# Altium PCB customteensypcb.PcbDoc (part 2 of 2)
Units mil, origin at the board's own origin, x right, y up, seen from the top; angles counter-clockwise.
Board outline 6000 x 4000 mil, 2 copper layers (Top Layer, Bottom Layer); 32 components, 60 nets, 197 pads, 41 vias.
Unrouted connection lines stored in the file: 2.
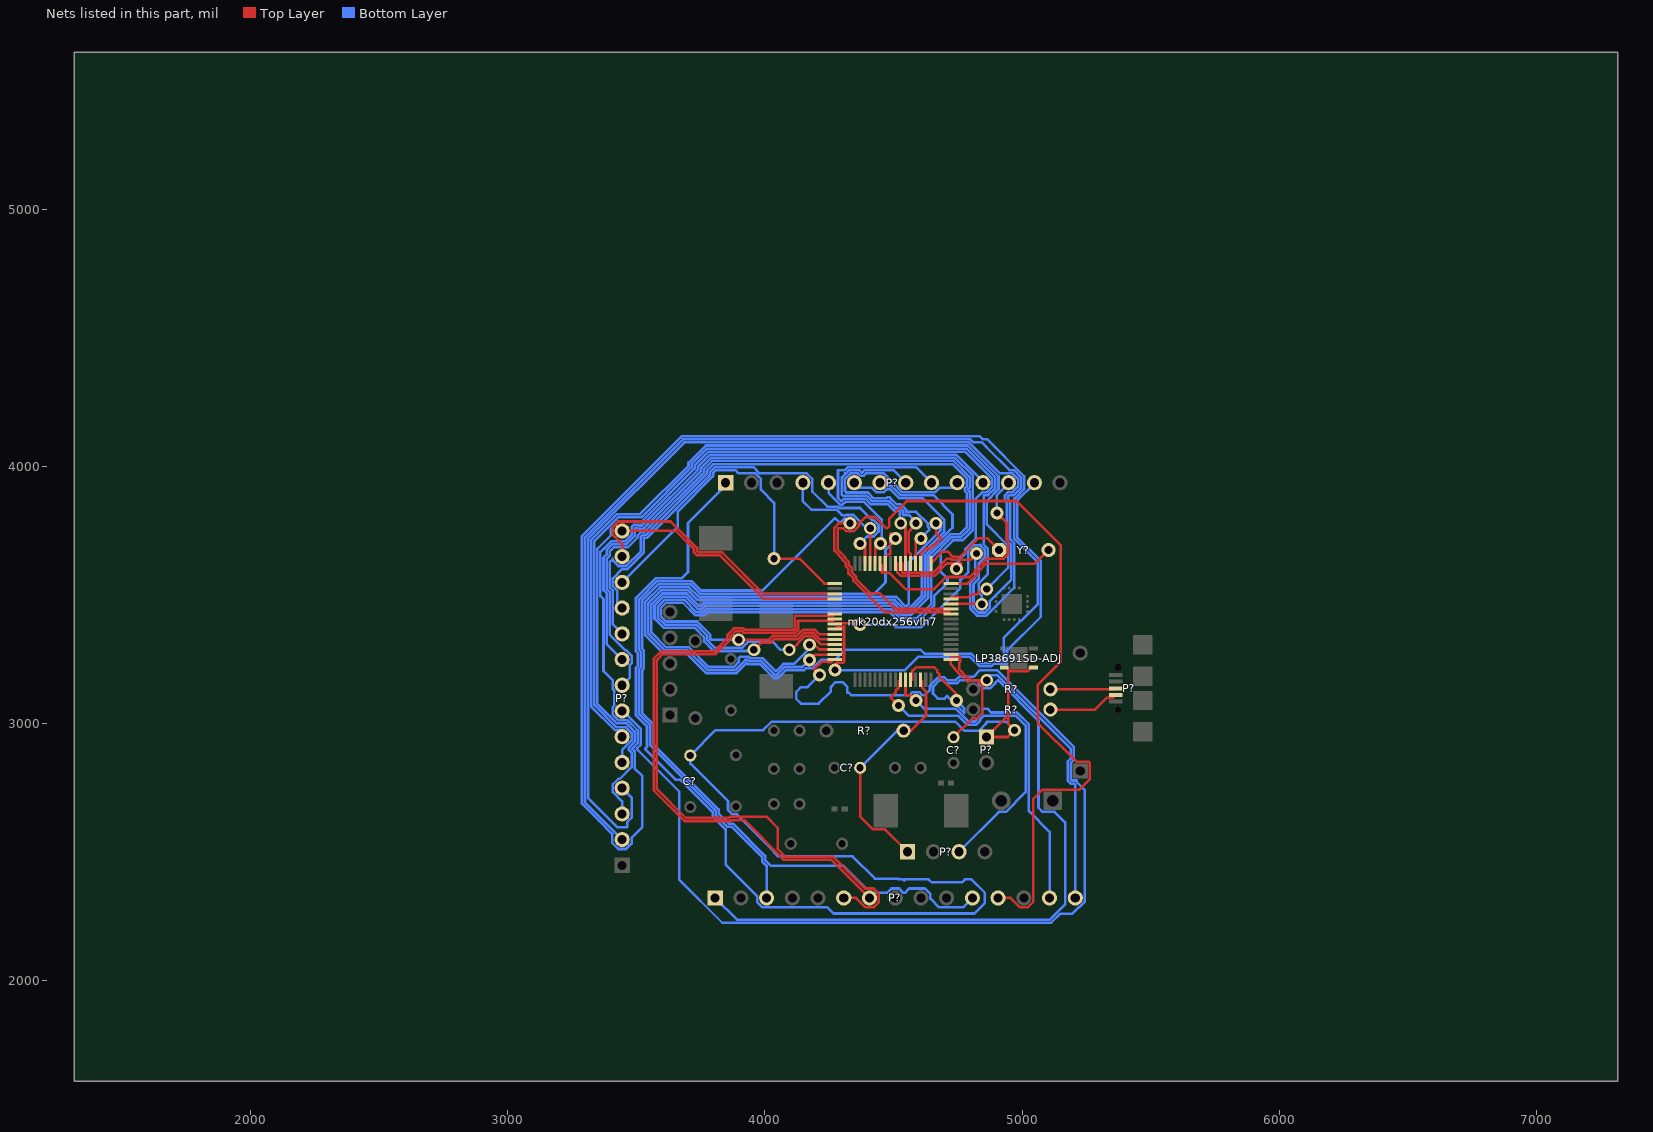
[diagram p2: the nets of this part, all layers, seen from the top]

## Via types
v1: diameter 50, hole 28, Top Layer to Bottom Layer, 41 vias

## Nets (pads, with @x,y where several pads share a name; then routed paths per layer and width w, separated by ;. In a path a pad name is that pad's centre, name@x,y a point inside that pad or via, vN(x,y) a via of type N, cw(c..) or ccw(c..) an arc to the next point about the centre after c; other vN are vias at no path point) (continued)
Netmk20dx256vlh7_10: mk20dx256vlh7.10 P?.3@4754.54,2502.37 | length 1303
  Top Layer w10: v1(4519.1,3070.87) 4488.2,3101.78 4507.88,3121.46 4507.88,3129.89 4512.99,3135 4515.7,3135 4519.8,3139.1 4519.8,3164.25 mk20dx256vlh7.10@4526.58,3171.03
  Bottom Layer w10: v1(4519.1,3070.87) 4558.18,3031.79 4750.17,3031.79 4785.4,2996.57 4821.91,2996.57 4835.97,3010.63 4835.97,3015.6 4852.17,3031.79 4974.74,3031.79 5013.5,2993.04 5013.5,2734.18 4936.69,2657.38 4909.54,2657.38 P?.3@4754.54,2502.37
Netmk20dx256vlh7_11: mk20dx256vlh7.11 P?.14@5106.31,2322.84 | length 1349.3
  Top Layer w10: mk20dx256vlh7.11@4546.27,3171.03 4546.27,3111.23 4565.94,3111.23 v1(4586.61,3090.55)
  Bottom Layer w10: v1(4586.61,3090.55) 4618.62,3058.56 4740.38,3058.56 4790.37,3008.57 4816.94,3008.57 4823.97,3015.6 4823.97,3020.57 4844.21,3040.81 4844.21,3058.56 4864.72,3058.56 4879.48,3043.79 4979.71,3043.79 5025.5,2998.01 5025.5,2660.36 5106.31,2579.55 P?.14@5106.31,2322.84
Netmk20dx256vlh7_12: mk20dx256vlh7.12 P?.1@3806.31,2322.84 | length 3280.1
  Top Layer w10: mk20dx256vlh7.12@4565.95,3171.03 4572.73,3171.03 4572.73,3207.07 4575.45,3207.07 4587.45,3219.07 4641.16,3219.07 4658.47,3219.07 4669.6,3207.94 4669.6,3201.72 4677.36,3193.95 4677.36,3182.87 4744.1,3116.13 v1(4744.1,3090.56)
  Bottom Layer w10: P?.1@3806.31,2322.84 3890.84,2238.31 5107.38,2238.31 5155,2285.94 5166.84,2297.77 5166.84,2616.75 5126.2,2657.38 5079.39,2657.38 5063.37,2673.4 5063.37,3011.04 4905.12,3169.29 4894.19,3158.36 4894.19,3156.03 4875.45,3137.28 4848.94,3137.28 4830.19,3156.03 4830.19,3162.2 4823.1,3169.29 4758.35,3169.29 4746.35,3157.29 4702.94,3157.29 4690.94,3169.29 4679.16,3169.29 4653.05,3143.18 4653.05,3116.67 4671.79,3097.93 4698.3,3097.93 4708.14,3107.77 4775.09,3040.81 4775.09,3059.57 v1(4744.1,3090.56)
Netmk20dx256vlh7_18: mk20dx256vlh7.18 P?.15 | length 1313.5
  Top Layer w10: mk20dx256vlh7.18@4722.96,3268.98 4722.96,3262.2 4754.9,3262.2 4759,3258.1 4759,3240.49 4755.78,3237.27 4755.78,3210.76 4786.12,3180.42 4790.23,3180.42 4797.26,3173.4 4797.26,3169.28 v1(4862.19,3169.28)
  Bottom Layer w10: v1@4843.34,3169.29 v1@4861.77,3187.73 ; v1(4862.19,3169.28) 4862.19,3187.31 v1@4861.77,3187.73 ; P?.15@5206.31,2322.84 5206.31,2761.99 5200.87,2767.42 5188,2767.42 5176.87,2778.55 5176.87,2853.35 5188.87,2865.35 5188.87,2902.51 4903.66,3187.73 v1@4861.77,3187.73
Netmk20dx256vlh7_26: mk20dx256vlh7.26 P?.3@4006.31,2322.84 | length 3192.9
  Top Layer w10: mk20dx256vlh7.26@4722.96,3426.46 4716.18,3433.24 4466.14,3433.24 4343.19,3556.2 4343.19,3565.88 4326.25,3582.81 4324.51,3582.81 4324.51,3601.52 4314.08,3611.95 4314.08,3624.24 4300.01,3638.31 4300.01,3643 4270.06,3672.94 4270.06,3760.97 4288.63,3779.53 v1(4330.71,3779.53) ; v1(4330.71,3779.53) 4350.39,3779.53 4330.71,3799.21 v1(4330.71,3779.53)
  Bottom Layer w10: P?.3@4006.31,2322.84 4006.31,2447.28 3988.84,2464.76 3988.84,2481.73 3871.22,2599.34 3854.25,2599.34 3808.2,2645.39 3808.2,2662.36 3553.41,2917.15 3553.41,2994.56 3510.39,3037.58 3510.39,3212.54 3517.41,3219.56 3517.41,3279.65 3510.39,3286.67 3510.39,3483.79 3580.99,3554.39 3715.19,3554.39 3751.71,3517.87 3990.31,3517.87 4271.66,3799.22 4291.35,3779.53 4311.02,3799.21 v1(4330.71,3779.53)
Netmk20dx256vlh7_27: mk20dx256vlh7.27 P?.12@4906.31,2322.84 | length 3562.8
  Top Layer w10: mk20dx256vlh7.27@4722.96,3446.15 4506.86,3446.15 4445.13,3507.88 4408.47,3507.88 4355.19,3561.17 4355.19,3570.85 4336.51,3589.52 4336.51,3606.49 4326.08,3616.92 4326.08,3629.21 4312.01,3643.28 4312.01,3647.97 4282.06,3677.91 4282.06,3756 4285.92,3759.85 4305.13,3759.85 4317.45,3747.53 4343.96,3747.53 4365.44,3769 4365.44,3778.06 4391.21,3803.84 4427.67,3803.84 4471.65,3759.85 4474.4,3759.85 4483.55,3769 4483.55,3797.75 4551.76,3865.95 4977.66,3865.95 5149.13,3694.49 5149.13,3239.18 5060.24,3150.29 5060.24,3002.99 5210.75,2852.48 5257.83,2852.48 5261.93,2848.38 5261.93,2783.53 5222.62,2744.21 5079.39,2744.21 5042.84,2707.65 5042.84,2307.71 5021.44,2286.31 4991.18,2286.31 4954.65,2322.84 P?.12@4906.31,2322.84
Netmk20dx256vlh7_28: mk20dx256vlh7.28 P?.5@3444.88,2849.61 | length 3386
  Top Layer w10: mk20dx256vlh7.28@4722.96,3465.83 v1@4841.25,3465.83
  Bottom Layer w10: P?.5@3444.88,2849.61 3444.88,2897.95 3481.41,2934.48 3481.41,2964.74 3460.01,2986.13 3422.76,2986.13 3336.35,3072.54 3336.35,3709.71 3429.23,3802.58 3520,3802.58 3714.72,3997.31 3714.72,4009.21 3775.06,4069.54 4783.35,4069.54 4895.78,3957.12 4895.78,3916.91 4867.35,3888.49 4850.38,3888.49 4850.19,3888.3 4850.19,3696.28 4866.83,3679.64 4866.83,3582.66 4830.19,3546.02 4830.19,3510.36 4842.52,3498.04 v1(4842.52,3464.57)
Netmk20dx256vlh7_29: mk20dx256vlh7.29 P?.6@3444.88,2949.61 | length 3303.6
  Top Layer w10: mk20dx256vlh7.29@4722.96,3485.52 4729.74,3492.3 4790.29,3492.3 4801.93,3503.94 4825.37,3503.94 4845.05,3523.61 v1(4862.19,3523.61)
  Bottom Layer w10: P?.6@3444.88,2949.61 3444.88,2973.95 3417.97,2973.95 3324.35,3067.56 3324.35,3714.68 3424.26,3814.58 3515.03,3814.58 3702.72,4002.28 3702.72,4014.18 3770.09,4081.54 4788.32,4081.54 4907.78,3962.09 4907.78,3911.94 4862.19,3866.36 4862.19,3774.69 4945,3691.88 4945,3606.42 v1(4862.19,3523.61)
Netmk20dx256vlh7_32: mk20dx256vlh7.32 Y?.2 | length 437.2
  Top Layer w10: mk20dx256vlh7.32@4722.96,3544.57 4787.9,3544.57 4827.46,3584.14 4827.46,3590.02 4859.49,3622.05 5049.41,3622.05 Y?.2@5102.57,3675.2
Netmk20dx256vlh7_33: mk20dx256vlh7.33 Y?.1 | length 341.5
  Top Layer w10: mk20dx256vlh7.33@4644.69,3622.84 4690.95,3669.1 4710.84,3669.1 4730.84,3649.1 4757.35,3649.1 4828.72,3720.47 4865.17,3720.47 Y?.1@4910.44,3675.2
Netmk20dx256vlh7_35: mk20dx256vlh7.35 P?.11@4847.25,3937.02 | length 10477.7
  Top Layer w10: mk20dx256vlh7.35@4605.32,3622.84 4605.32,3660.44 4625.98,3681.1 4641.14,3681.1 4653.14,3693.1 4657.67,3693.1 4685.03,3720.46 4665.35,3740.15 v1(4665.35,3779.52)
  Bottom Layer w10: 4685.03,3763.02 4668.53,3779.52 v1(4665.35,3779.52) 4665.35,3773.63 4685.03,3753.95 4559.24,3628.16 4559.24,3465.42 4552.21,3458.39 4544.53,3458.39 4509.06,3493.87 3741.77,3493.87 3705.24,3530.39 3590.93,3530.39 3534.39,3473.85 3534.39,3344.79 3605.84,3273.34 3694.85,3273.34 3770.83,3197.35 3889.76,3197.35 3928.44,3236.03 3928.87,3236.03 3933.5,3231.4 3979.89,3231.4 4034.12,3177.17 4049.86,3177.17 4081.35,3208.66 4152.6,3208.66 4159.97,3216.03 4186.48,3216.03 4218.48,3248.03 4271.65,3248.03 4311.02,3287.4 4605.62,3287.4 4620.68,3272.34 4801.68,3272.34 4838.31,3235.71 4875.45,3235.71 4884.71,3244.97 4928.94,3244.97 4928.94,3334.46 5060.66,3466.17 5060.66,3627.13 4968.31,3719.48 4968.31,3875.05 4969.75,3876.49 4972.32,3876.49 5007.78,3911.94 5007.78,3962.09 4863.38,4106.49 4846.41,4106.49 4835.35,4117.54 3676.31,4117.54 3288.35,3729.59 3288.35,2689.16 3354.14,2623.38 3405.51,2572.01 3405.51,2537.32 3429.75,2513.08 3460.01,2513.08 3481.41,2534.48 3481.41,2556.21 3523.62,2598.43 3523.62,2796.62 3493.41,2826.83 3493.41,2892.3 3493.41,2893.7 3492.01,2893.7 3483.29,2902.42 3505.41,2924.54 3505.41,2974.68 3467.01,3013.08 3429.75,3013.08 3408.35,3034.48 3408.35,3064.74 3414.14,3070.52 3414.14,3128.69 3408.35,3134.48 3408.35,3168.42 3372.35,3204.42 3372.35,3484.25 3360.35,3496.25 3360.35,3667.65 3402.84,3710.13 3432.7,3710.13 3457.07,3710.13 3481.41,3734.48 3481.41,3763.99 3491.55,3774.13 3508.52,3774.13 3512.04,3770.62 3521.98,3770.62 3529.01,3777.65 3738.72,3987.36 3738.72,3999.27 3785,4045.54 4743.73,4045.54 4847.25,3942.02 P?.11@4847.25,3937.02
Netmk20dx256vlh7_36: mk20dx256vlh7.36 P?.10@4747.25,3937.02 | length 1102.4
  Top Layer w10: mk20dx256vlh7.36@4585.64,3622.84 4585.64,3719.5 v1@4586.61,3720.47
  Bottom Layer w10: v1(4606.3,3720.47) 4638.3,3752.47 4638.3,3761.31 4633.35,3766.27 4633.35,3778.03 4587.86,3823.52 4548.51,3823.52 4548.51,3832.36 4528.38,3852.49 4512.24,3852.49 4484.73,3880 4475.84,3880 4472.32,3876.49 4422.18,3876.49 4399.78,3898.89 4316.75,3898.89 4311,3904.64 4311,3921.61 4310.72,3921.89 4310.72,3952.15 4332.12,3973.54 4362.38,3973.54 4372.33,3963.6 4382.27,3963.6 4392.22,3973.54 4462.38,3973.54 4510.72,3925.2 4510.72,3921.89 4532.12,3900.49 4662.38,3900.49 4679.22,3917.32 4727.56,3917.32 P?.10@4747.25,3937.02
Netmk20dx256vlh7_37: mk20dx256vlh7.37 P?.8@4547.25,3937.02 | length 913.1
  Top Layer w10: mk20dx256vlh7.37@4565.95,3622.84 4565.95,3660.44 4558.27,3668.13 4558.27,3745.3 4592.49,3779.52 v1(4586.6,3779.52)
  Bottom Layer w10: P?.8@4547.25,3937.02 4498.72,3985.54 4387.25,3985.54 4377.3,3975.6 4367.35,3985.54 4327.15,3985.54 4315.15,3973.54 4311,3973.54 4311,3969.39 4298.72,3957.12 4298.72,3890.25 4302.09,3886.89 4394.81,3886.89 4417.21,3864.49 4483.27,3864.49 4507.27,3840.49 4523.41,3840.49 4536.51,3827.39 4536.51,3811.52 4560.49,3811.52 4579.23,3792.77 4579.23,3790.88 4590.82,3790.88 v1@4602.17,3779.53 ; v1(4586.6,3779.52) v1@4602.16,3779.52
Netmk20dx256vlh7_38: mk20dx256vlh7.38 P?.9@4647.25,3937.02 | length 992.5
  Top Layer w10: v1(4527.55,3779.52) 4545.3,3779.52 4546.27,3778.55 mk20dx256vlh7.38@4546.27,3622.84
  Bottom Layer w10: v1(4527.55,3779.52) 4524.51,3782.56 4524.51,3822.42 4518.44,3828.49 4502.3,3828.49 4478.3,3852.49 4412.24,3852.49 4389.84,3874.89 4307.5,3874.89 4297.1,3864.49 4283.78,3877.81 4283.78,3985.54 4310.18,3985.54 4322.18,3997.54 4586.72,3997.54 P?.9@4647.25,3937.02
Netmk20dx256vlh7_39: mk20dx256vlh7.39 P?.2@3444.88,2549.61 | length 4437.6
  Top Layer w10: mk20dx256vlh7.39@4526.58,3622.84 4533.36,3622.84 4533.36,3586.81 4653.5,3586.81 4708.42,3641.73 4721.24,3641.73 4725.87,3637.1 4798.52,3637.1 v1(4822.83,3661.42)
  Bottom Layer w10: P?.2@3444.88,2549.61 3300.35,2694.13 3300.35,3724.62 3681.28,4105.54 4798.26,4105.54 4809.32,4094.49 4842.52,4094.49 4861.12,4075.89 4861.12,4074.8 4950.38,3985.54 4967.35,3985.54 4995.78,3957.12 4995.78,3916.91 4967.35,3888.49 4950.38,3888.49 4945,3883.11 4945,3871.18 4952.94,3863.24 4952.94,3717.88 4969,3701.82 4969,3528.82 4860.74,3420.57 4824.29,3420.57 4798.52,3446.34 4798.52,3548.29 4818.19,3567.96 4818.19,3656.78 v1(4822.83,3661.42)
Netmk20dx256vlh7_40: mk20dx256vlh7.40 P?.3@3444.88,2649.61 | length 3697.9
  Top Layer w10: mk20dx256vlh7.40@4506.9,3622.84 4513.68,3622.84 4513.68,3586.81 4516.39,3586.81 4528.39,3574.81 4658.47,3574.81 4706.5,3622.84 4762.98,3622.84 4763.78,3622.05 v1(4744.09,3602.36)
  Bottom Layer w10: P?.3@3444.88,2649.61 3444.88,2697.95 3408.35,2734.48 3408.35,2764.74 3429.75,2786.13 3435.74,2786.13 3481.41,2831.8 3481.41,2887.33 3471.29,2897.45 3471.29,2907.39 3493.41,2929.51 3493.41,2969.71 3462.04,3001.08 3424.78,3001.08 3348.35,3077.51 3348.35,3680.29 3400.48,3732.41 3400.48,3756.86 3429.75,3786.13 3513.49,3786.13 3517.01,3782.62 3726.72,3992.34 3726.72,4004.24 3780.03,4057.54 4778.38,4057.54 4883.78,3952.15 4883.78,3921.89 4862.38,3900.49 4845.41,3900.49 4819.78,3874.86 4819.78,3720.59 4778.83,3679.64 4778.83,3662.67 4756.09,3639.93 4756.09,3634.52 4744.09,3622.52 v1(4744.09,3602.36)
Netmk20dx256vlh7_42: mk20dx256vlh7.42 P?.11@4806.31,2322.84 | length 3517.2
  Top Layer w10: mk20dx256vlh7.42@4467.53,3622.84 4467.53,3648 4478.41,3658.88 4485.65,3658.88 4487.21,3660.44 4487.21,3738.72 4488.64,3740.15 4507.87,3720.91 v1(4507.87,3720.47)
  Bottom Layer w10: v1(4507.87,3720.47) 4513.76,3720.47 4468.5,3675.22 4468.5,3549.13 4425.24,3505.87 3746.74,3505.87 3710.22,3542.39 3585.96,3542.39 3522.39,3478.82 3522.39,3291.64 3529.41,3284.62 3529.41,3214.59 3522.39,3207.57 3522.39,3042.55 3565.41,2999.53 3565.41,2922.12 3820.2,2667.34 3820.2,2650.36 3859.22,2611.34 3876.19,2611.34 4000.84,2486.7 4000.84,2469.73 4021.92,2448.64 4303.33,2448.64 4392.6,2359.37 4421.44,2359.37 4438.29,2342.52 4474.33,2342.52 4491.18,2359.37 4521.44,2359.37 4538.29,2342.52 4543.85,2342.52 4560.7,2359.37 4621.44,2359.37 4642.84,2337.97 4642.84,2320.51 4677.04,2286.31 4769.78,2286.31 P?.11@4806.31,2322.84
Netmk20dx256vlh7_43: mk20dx256vlh7.43 P?.12@4947.25,3937.02 | length 922
  Top Layer w10: mk20dx256vlh7.43@4447.84,3622.84 4454.62,3616.06 4454.62,3586.81 4483.88,3586.81 4547.06,3523.62 4657.17,3523.62 4703.91,3570.36 4796.72,3570.36 4815.46,3589.11 4815.46,3594.99 4861.12,3640.65 4927.12,3640.65 4945,3658.53 4945,3708.68 4940.94,3712.73 4940.94,3779.53 4921.26,3799.21 v1@4901.57,3799.21
  Bottom Layer w10: v1(4901.57,3818.9) 4901.57,3888.77 4947.25,3934.45 P?.12@4947.25,3937.02
Netmk20dx256vlh7_44: mk20dx256vlh7.44 P?.5@4247.25,3937.02 | length 500.6
  Top Layer w10: mk20dx256vlh7.44@4428.16,3622.84 4428.16,3699.81 v1@4448.82,3720.47
  Bottom Layer w10: P?.5@4247.25,3937.02 4247.25,3896.92 4293.59,3850.58 4300.17,3850.58 4312.47,3862.89 4384.87,3862.89 4453.44,3794.32 4453.44,3705.41 v1(4448.82,3700.79)
Netmk20dx256vlh7_45: mk20dx256vlh7.45 P?.4@4147.25,3937.02 | length 515.9
  Top Layer w10: mk20dx256vlh7.45@4408.47,3622.84 4409.45,3623.82 4409.45,3720.45 v1(4409.44,3759.84)
  Bottom Layer w10: P?.4@4147.25,3937.02 4147.25,3864.56 4179.81,3832 4278.23,3832 ; 4278.09,3832.14 4278.23,3832 ; v1(4409.44,3759.84) 4395.66,3759.84 4343.96,3811.53 4317.45,3811.53 4317.14,3811.21 4299.02,3811.21 4278.23,3832
Netmk20dx256vlh7_46: mk20dx256vlh7.46 P?.11@3444.88,3449.61 | length 1727
  Top Layer w10: v1@4370.08,3720.47 4388.79,3701.76 mk20dx256vlh7.46@4388.79,3622.84
  Bottom Layer w10: P?.11@3444.88,3449.61 3425.2,3469.29 3425.2,3517.63 3408.35,3534.48 3408.35,3564.74 3444.7,3601.08 3464.98,3601.08 3529.41,3665.51 3529.41,3722.07 3529.96,3722.62 3541.86,3722.62 3577.01,3757.77 3786.72,3967.48 3786.72,3979.38 3804.88,3997.54 3955.35,3997.54 3979.35,3973.54 4162.38,3973.54 4183.78,3952.15 4183.78,3902.5 4242.14,3844.14 4283.06,3844.14 4288.62,3838.58 4370.08,3838.58 4416.83,3791.84 4422.69,3791.84 4441.44,3773.09 4441.44,3746.58 4422.69,3727.84 4397.13,3727.84 v1(4370.08,3700.79)
Netmk20dx256vlh7_49: mk20dx256vlh7.49 P?.12@3444.88,3549.61 | length 1382.6
  Top Layer w10: v1(4035.43,3641.73) 4133.86,3641.73 4231.02,3544.57 mk20dx256vlh7.49@4271.15,3544.57
  Bottom Layer w10: P?.12@3444.88,3549.61 3661.42,3766.14 3661.42,3825.2 3798.72,3962.51 3798.72,3974.41 3809.85,3985.54 3884.65,3985.54 3896.65,3973.54 3962.38,3973.54 3983.78,3952.15 3983.78,3909.92 4035.43,3858.27 v1(4035.43,3641.73)
Netmk20dx256vlh7_51: mk20dx256vlh7.51 P?.13@3444.88,3649.61 | length 1125.8
  Top Layer w10: P?.13@3444.88,3649.61 3444.88,3697.95 3408.35,3734.48 3408.35,3764.74 3429.75,3786.13 3633.58,3786.13 3736.12,3683.6 3736.12,3670.73 3740.22,3666.63 3833.37,3666.63 3994.8,3505.2 mk20dx256vlh7.51@4271.15,3505.2
Netmk20dx256vlh7_52: mk20dx256vlh7.52 P?.14@3444.88,3749.61 | length 943.2
  Top Layer w10: P?.14@3444.88,3749.61 3653.14,3749.61 3724.12,3678.63 3724.12,3665.76 3735.25,3654.63 3825.94,3654.63 3995.05,3485.52 mk20dx256vlh7.52@4271.15,3485.52
Netmk20dx256vlh7_55: mk20dx256vlh7.55 P?.7@4406.31,2322.84 | length 2343.8
  Top Layer w10: mk20dx256vlh7.55@4271.15,3426.46 4264.37,3419.68 4116.26,3419.68 4116.26,3369.16 4112.16,3365.05 3976.44,3365.05 3975.35,3366.14 3920.49,3366.14 3915.86,3370.77 3879.41,3370.77 3853.64,3345 3853.64,3332.7 3803.33,3282.39 3596.92,3282.39 3567.54,3253.01 3567.54,2741.26 3687.03,2621.76 3864.56,2621.76 3868.08,2625.28 3919.84,2625.28 4074.27,2470.85 4258.3,2470.85 P?.7@4406.31,2322.84
Netmk20dx256vlh7_56: mk20dx256vlh7.56 P?.6@4306.31,2322.84 | length 2567.2
  Top Layer w10: mk20dx256vlh7.56@4271.15,3406.78 4264.37,3400 4128.26,3400 4128.26,3364.18 4117.13,3353.05 3971.47,3353.05 3970.38,3354.14 3915.52,3354.14 3910.89,3358.77 3884.38,3358.77 3865.64,3340.03 3865.64,3327.73 3808.3,3270.39 3601.89,3270.39 3579.54,3248.04 3579.54,2746.23 3692,2633.76 3859.59,2633.76 3863.63,2637.8 4007.21,2637.8 4049.58,2595.43 4049.58,2512.5 4079.24,2482.85 4265.98,2482.85 4389.46,2359.37 4421.44,2359.37 4442.84,2337.97 4442.84,2307.71 4421.44,2286.31 4391.18,2286.31 4354.65,2322.84 P?.6@4306.31,2322.84
Netmk20dx256vlh7_57: mk20dx256vlh7.57 P?.4@3444.88,2749.61 | length 4987.2
  Top Layer w10: mk20dx256vlh7.57@4271.15,3387.09 4274.34,3390.29 4365.62,3390.29 v1(4370.08,3385.83) v1@4370.08,3366.14
  Bottom Layer w10: P?.4@3444.88,2749.61 3481.41,2713.08 3481.41,2634.48 3464.57,2617.63 3464.57,2598.43 3425.2,2598.43 3312.35,2711.27 3312.35,3719.65 3686.25,4093.54 4793.29,4093.54 4913.29,3973.54 4962.38,3973.54 4983.78,3952.15 4983.78,3921.89 4962.38,3900.49 4945.41,3900.49 4933,3888.08 4933,3866.21 4940.94,3858.27 4940.94,3712.91 4957,3696.85 4957,3559.36 4874.52,3476.88 4874.52,3451.31 4855.77,3432.57 4829.26,3432.57 4810.52,3451.31 4810.52,3543.32 4830.19,3562.99 4830.19,3623.52 4854.83,3648.16 4854.83,3674.67 4838.19,3691.31 4838.19,3696.46 4835.15,3693.42 4809.58,3693.42 4790.83,3674.67 4790.83,3590.05 4759.65,3558.86 4759.65,3527.64 4606.41,3374.39 4509.74,3374.39 4498.3,3385.83 v1(4370.08,3385.83)
Netmk20dx256vlh7_58: mk20dx256vlh7.58 P?.13@5047.25,3937.02 | length 1772.9
  Top Layer w10: mk20dx256vlh7.58@4271.15,3367.41 4277.93,3374.19 4303.08,3374.19 4307.19,3378.29 4307.19,3240.49 4303.08,3236.39 4279.7,3236.39 4271.65,3228.35 v1(4271.65,3208.66)
  Bottom Layer w10: v1(4271.65,3208.66) 4543.85,3208.66 4595.52,3260.34 4796.71,3260.34 4833.34,3223.71 4880.42,3223.71 4889.68,3232.97 4940.94,3232.97 4940.94,3284.23 5072.66,3415.95 5072.66,3632.1 4980.31,3724.45 4980.31,3867.51 5047.25,3934.45 P?.13@5047.25,3937.02
Netmk20dx256vlh7_59: mk20dx256vlh7.59 P?.9@3444.88,3249.61 | length 4614.1
  Top Layer w10: v1(3897.64,3326.77) 4015.75,3326.77 4030.03,3341.05 4122.1,3341.05 4146.1,3365.05 4194.46,3365.05 4211.79,3347.72 mk20dx256vlh7.59@4271.15,3347.72
  Bottom Layer w10: P?.9@3444.88,3249.61 3384.35,3310.13 3384.35,3507.56 3372.35,3519.56 3372.35,3645.71 3384.35,3657.71 3384.35,3674.68 3407.81,3698.13 3427.73,3698.13 3462.04,3698.13 3493.41,3729.51 3493.41,3759.02 3496.52,3762.13 3503.55,3762.13 3507.07,3758.62 3526.95,3758.62 3541.01,3772.68 3750.72,3982.39 3750.72,3994.29 3789.97,4033.54 4738.76,4033.54 4807.78,3964.52 4807.78,3752.94 4767.94,3713.1 4730.84,3713.1 4683.42,3665.68 4683.42,3589.98 4709.49,3563.91 4709.49,3547.78 4657.67,3495.97 4657.67,3459.6 4596.47,3398.39 4519.68,3398.39 4484.2,3433.87 3777.34,3433.87 3764.81,3421.34 3729.45,3421.34 3680.39,3470.39 3615.78,3470.39 3594.39,3449 3594.39,3418.74 3615.78,3397.34 3736.48,3397.34 3787.9,3345.92 3787.9,3328.95 3790.07,3326.77 v1(3897.64,3326.77)
Netmk20dx256vlh7_60: mk20dx256vlh7.60 P?.10@3444.88,3349.61 | length 4487
  Top Layer w10: v1(3956.69,3287.4) 3984.06,3314.77 4020.72,3314.77 4033.99,3328.04 4126.06,3328.04 4151.07,3353.05 4189.49,3353.05 4214.5,3328.04 mk20dx256vlh7.60@4271.15,3328.04
  Bottom Layer w10: P?.10@3444.88,3349.61 3408.35,3386.13 3408.35,3517.51 3396.35,3529.51 3396.35,3628.74 3408.35,3640.74 3408.35,3634.48 3429.75,3613.08 3460.01,3613.08 3517.41,3670.48 3517.41,3727.04 3524.99,3734.62 3536.89,3734.62 3565.01,3762.74 3774.72,3972.45 3774.72,3984.35 3799.91,4009.54 4728.81,4009.54 4783.78,3954.58 4783.78,3921.89 4776.77,3914.87 4776.77,3904.93 4783.78,3897.92 4783.78,3762.88 4758,3737.1 4720.9,3737.1 4633.67,3649.87 4633.67,3488.94 4567.13,3422.39 4529.62,3422.39 4494.15,3457.87 3767.4,3457.87 3755.4,3445.87 3738.86,3445.87 3690.33,3494.39 3605.84,3494.39 3570.39,3458.94 3570.39,3408.79 3605.84,3373.34 3726.54,3373.34 3763.9,3335.98 3763.9,3319.01 3800.13,3282.77 3952.06,3282.77 v1(3956.69,3287.4)
Netmk20dx256vlh7_61: mk20dx256vlh7.61 P?.8@3444.88,3149.61 | length 4734.4
  Top Layer w10: v1(4094.49,3287.4) 4102.39,3287.4 4156.04,3341.05 4184.52,3341.05 4217.22,3308.35 mk20dx256vlh7.61@4271.15,3308.35
  Bottom Layer w10: P?.8@3444.88,3149.61 3474.39,3179.11 3474.39,3227.45 3481.41,3234.48 3481.41,3264.74 3460.01,3286.13 3456.7,3286.13 3396.35,3346.48 3396.35,3512.54 3384.35,3524.54 3384.35,3640.74 3396.35,3652.74 3396.35,3669.71 3412.78,3686.13 3467.01,3686.13 3505.41,3724.54 3505.41,3732.01 3520.02,3746.62 3531.92,3746.62 3553.01,3767.71 3762.72,3977.42 3762.72,3989.32 3794.94,4021.54 4733.78,4021.54 4795.78,3959.55 4795.78,3916.91 4788.77,3909.9 4795.78,3902.89 4795.78,3757.91 4762.97,3725.1 4725.87,3725.1 4645.67,3644.9 4645.67,3464.57 4591.5,3410.39 4524.65,3410.39 4489.18,3445.87 3772.37,3445.87 3759.84,3433.34 3734.42,3433.34 3685.36,3482.39 3610.81,3482.39 3582.39,3453.97 3582.39,3413.76 3610.81,3385.34 3731.51,3385.34 3775.9,3340.95 3775.9,3323.98 3805.1,3294.77 3910.89,3294.77 3935.52,3319.4 4029,3319.4 4061,3287.4 v1(4094.49,3287.4)
Netmk20dx256vlh7_62: mk20dx256vlh7.62 P?.7@4447.25,3937.02 | length 2808
  Top Layer w10: v1@4192.91,3307.09 4211.33,3288.67 mk20dx256vlh7.62@4271.15,3288.67
  Bottom Layer w10: v1(4173.23,3307.09) 4173.23,3293.29 4112.6,3232.66 4071.41,3232.66 4041.99,3203.24 3989.83,3255.4 3943.44,3255.4 3938.81,3260.03 3902.38,3260.03 3897.76,3255.4 3897.76,3239.29 3879.82,3221.35 3780.77,3221.35 3704.79,3297.34 3615.78,3297.34 3558.39,3354.74 3558.39,3463.91 3600.87,3506.39 3695.3,3506.39 3743.83,3457.87 3750.43,3457.87 3762.43,3469.87 4499.12,3469.87 4534.59,3434.39 4562.16,3434.39 4621.67,3493.91 4621.67,3654.84 4729.03,3762.2 4729.03,3814.28 4654.82,3888.49 4527.15,3888.49 4491.15,3924.49 4459.78,3924.49 P?.7@4447.25,3937.02
Netmk20dx256vlh7_63: mk20dx256vlh7.63 P?.6@4347.25,3937.02 | length 2860.8
  Top Layer w10: v1(4173.23,3248.03) 4194.18,3268.98 mk20dx256vlh7.63@4271.15,3268.98
  Bottom Layer w10: v1(4173.23,3248.03) 4145.86,3220.66 4076.38,3220.66 4044.89,3189.17 4039.09,3189.17 3984.86,3243.4 3938.47,3243.4 3933.84,3248.03 3923.47,3248.03 3884.79,3209.35 3775.8,3209.35 3699.82,3285.34 3610.81,3285.34 3546.39,3349.76 3546.39,3468.88 3595.9,3518.39 3700.27,3518.39 3736.8,3481.87 4504.09,3481.87 4539.56,3446.39 4557.19,3446.39 4609.67,3498.88 4609.67,3659.81 4697.35,3747.49 4697.35,3792.77 4613.63,3876.49 4522.18,3876.49 4486.18,3912.49 4474.38,3912.49 4462.38,3900.49 4432.12,3900.49 4415.29,3917.32 4366.94,3917.32 P?.6@4347.25,3937.02
Netmk20dx256vlh7_64: mk20dx256vlh7.64 P?.7@3444.88,3049.61 | length 4707.5
  Top Layer w10: v1@4192.91,3188.98 4192.91,3214.55 4219.03,3240.66 4245.54,3240.66 4247.81,3238.39 4256.13,3238.39 4267.04,3249.3 mk20dx256vlh7.64@4271.15,3249.3
  Bottom Layer w10: P?.7@3444.88,3049.61 3447.45,3049.61 3517.41,2979.65 3517.41,2919.56 3500.96,2903.12 3505.41,2898.67 3505.41,2897.27 3667.03,2735.65 3667.03,2393.16 3833.88,2226.31 5112.35,2226.31 5148.16,2262.13 5195.2,2262.13 5219.39,2286.31 5221.44,2286.31 5242.84,2307.71 5242.84,2742.43 5212.7,2772.57 5212.7,2779.42 5192.97,2779.42 5188.87,2783.53 5188.87,2848.38 5200.87,2860.38 5200.87,2909.36 4901.57,3208.66 4836.21,3208.66 4809.97,3182.42 4754.51,3182.42 4741.38,3169.29 4707.91,3169.29 4695.91,3181.29 4674.19,3181.29 4641.05,3148.15 4641.05,3131.18 4621.11,3111.25 4611.17,3111.25 4599.87,3122.55 4573.36,3122.55 4561.36,3110.55 4335.86,3110.55 4325.66,3120.75 4320.2,3120.75 4320.2,3143.18 4301.45,3161.93 4274.94,3161.93 4256.2,3143.18 4256.2,3126.21 4208.22,3078.24 4140.29,3078.24 4121.54,3096.98 4121.54,3123.49 4140.29,3142.24 4165.86,3142.24 v1(4212.6,3188.98)
NetP?_2: P?.2@5363.2,3112.21 R?.1@5109.65,3055.13 | length 277.2
  Top Layer w10: R?.1@5109.65,3055.13 5283.25,3055.13 5329.62,3101.5 5352.48,3101.5 P?.2@5363.2,3112.21
NetP?_3: P?.3@5363.2,3137.8 R?.1@5109.65,3133.87 | length 255.2
  Top Layer w10: R?.1@5109.65,3133.87 5359.26,3133.87 P?.3@5363.2,3137.8
VIN: C?.1@3709.65,2876.39 LP38691SD-ADJ.1 LP38691SD-ADJ.6 P?.1@3847.25,3937.02 P?.1@4861.23,2948.43 | length 6395.8
  Top Layer w10: LP38691SD-ADJ.6@4929.51,3217.94 4946.13,3217.94 4946.13,3205.04 ; 4940.95,3028.16 P?.1@4861.23,2948.43 4943.12,2948.43 v1(4969.5,2974.81) 4946.13,2998.18 4946.13,3205.04 ; LP38691SD-ADJ.1@5038.5,3219.55 5036.9,3217.94 5027.06,3217.94 5027.06,3209.14 5022.96,3205.04 4946.13,3205.04
  Bottom Layer w10: P?.1@3847.25,3937.02 3847.25,3925.99 3700.79,3779.53 3700.79,3589.34 3677.84,3566.39 3576.02,3566.39 3498.39,3488.76 3498.39,3281.7 3505.41,3274.68 3505.41,3224.54 3498.39,3217.51 3498.39,3032.61 3541.41,2989.59 3541.41,2909.62 3534.2,2902.42 3654.9,2781.72 3671.87,2781.72 3796.2,2657.39 3796.2,2640.42 3847.25,2589.37 3847.25,2451.96 3969.78,2329.43 3969.78,2307.71 3991.18,2286.31 4242.84,2286.31 4266.84,2262.31 4814.41,2262.31 4854.84,2302.74 4854.84,2342.94 4802.41,2395.37 4789.67,2395.37 4777.26,2395.37 4765.26,2383.37 4648.35,2383.37 4636.35,2395.37 4545.79,2395.37 4541.07,2390.65 4536.35,2395.37 4519.38,2395.37 4517.14,2397.61 4427.67,2397.61 4340.64,2484.64 4050.8,2484.64 4036.84,2498.6 4036.84,2501.61 4035.43,2503.01 3891.11,2647.34 3874.14,2647.34 3856.2,2665.28 3856.2,2698.92 3709.65,2845.46 C?.1@3709.65,2876.39 3808.08,2974.81 3992.73,2974.81 4025.71,3007.79 4740.23,3007.79 4775.46,2972.57 4831.85,2972.57 4859.97,3000.68 4859.97,3005.66 4862.11,3007.79 4936.51,3007.79 v1(4969.5,2974.81)
VREFH: C?.1@4369.89,2828.75 mk20dx256vlh7.14 P?.1@4554.54,2502.37 R?.2@4538.79,2973.24 | length 919.2
  Top Layer w10: C?.1@4369.89,2828.75 4369.89,2638.93 4419.35,2589.46 4467.44,2589.46 P?.1@4554.54,2502.37 ; R?.2@4538.79,2973.24 4567.72,2973.24 4625.99,3031.5 4625.99,3125.21 4612.1,3139.1 4612.1,3164.25 mk20dx256vlh7.14@4605.32,3171.03
  Bottom Layer w10: C?.1@4369.89,2828.75 4514.38,2973.24 R?.2@4538.79,2973.24
VREFOut: C?.1@4733.28,2947.65 mk20dx256vlh7.17 | length 439.2
  Top Layer w10: mk20dx256vlh7.17@4722.96,3249.3 4722.96,3229.8 4739.45,3213.3 4739.45,3210.11 4788.24,3161.33 4795.34,3168.42 4823.97,3168.42 4844.21,3148.18 4844.21,3040.81 4823.97,3020.57 4806.2,3020.57 C?.1@4733.28,2947.65
pads on no net: B?.3 B?.5 B?.11 B?.12 B?.14 B?.15 B?.16 LP38691SD-ADJ.3 mk20dx256vlh7.8 mk20dx256vlh7.19 mk20dx256vlh7.20 mk20dx256vlh7.41 mk20dx256vlh7.53 mk20dx256vlh7.54 P?. P?.1@3630.91,3033.87 P?.4@4106.31,2322.84 P?.8@4506.31,2322.84 P?.9@4606.31,2322.84

## Text inside footprints (layer, text, board x,y; h text height)
P?: Mechanical 15 "PCB Edge" at 5557.09,3066.94 h39.37 r90